# EAGLE board CT_schematic (EAGLE 7.6.0)

Size 100 x 80 mm. Coordinates in mm from the lower left corner, seen from the top.
Outline: 0,0 100,0 100,80 0,80 0,0
Copper layers (1*16): Top 0.035mm / dielectric 1.5mm / Bottom 0.035mm
Design rules "default": minimum track width 10mil, minimum drill 24mil, track to track 8mil, track to pad 8mil, pad to pad 8mil, via to via 8mil, smd to smd 8mil, copper to edge 40mil, drill to drill 8mil, minimum pad ring 10mil, minimum via ring 8mil, stop-mask expansion 4mil, vias tented up to drill 0mil, thermal gap 10mil

## Footprints (pad centres in the part's own frame; a part is rotated, then mirrored left to right if it is on the bottom)
C0603 = smd 0.8 x 0.8: 1 -0.762,0; 2 0.762,0
C0402 = smd 0.5 x 0.5: 1 -0.508,0; 2 0.508,0
C0805 = smd 1.2 x 1.3: 1 -1.016,0; 2 1.016,0
C1206 = smd 1.3 x 1.6: 1 -1.524,0; 2 1.524,0
L0603 = smd 0.8 x 0.8: 1 -0.762,0; 2 0.762,0
L0806 = smd 1.016 x 1.524: 1 -0.889,0; 2 0.889,0
R0603 = smd 0.8 x 0.8: 1 -0.762,0; 2 0.762,0
TFBGA64 = smd 0.35 x 0.35: A1 -1.75,1.75; A2 -1.25,1.75; A3 -0.75,1.75; A4 -0.25,1.75; A5 0.25,1.75; A6 0.75,1.75; A7 1.25,1.75; A8 1.75,1.75; B1 -1.75,1.25; B2 -1.25,1.25; B3 -0.75,1.25; B4 -0.25,1.25; B5 0.25,1.25; B6 0.75,1.25; B7 1.25,1.25; B8 1.75,1.25; C1 -1.75,0.75; C2 -1.25,0.75; C3 -0.75,0.75; C4 -0.25,0.75; C5 0.25,0.75; C6 0.75,0.75; C7 1.25,0.75; C8 1.75,0.75; D1 -1.75,0.25; D2 -1.25,0.25; D3 -0.75,0.25; D4 -0.25,0.25; D5 0.25,0.25; D6 0.75,0.25; D7 1.25,0.25; D8 1.75,0.25; E1 -1.75,-0.25; E2 -1.25,-0.25; E3 -0.75,-0.25; E4 -0.25,-0.25; E5 0.25,-0.25; E6 0.75,-0.25; E7 1.25,-0.25; E8 1.75,-0.25; F1 -1.75,-0.75; F2 -1.25,-0.75; F3 -0.75,-0.75; F4 -0.25,-0.75; F5 0.25,-0.75; F6 0.75,-0.75; F7 1.25,-0.75; F8 1.75,-0.75; G1 -1.75,-1.25; G2 -1.25,-1.25; G3 -0.75,-1.25; G4 -0.25,-1.25; G5 0.25,-1.25; G6 0.75,-1.25; G7 1.25,-1.25; G8 1.75,-1.25; H1 -1.75,-1.75; H2 -1.25,-1.75; H3 -0.75,-1.75; H4 -0.25,-1.75; H5 0.25,-1.75; H6 0.75,-1.75; H7 1.25,-1.75; H8 1.75,-1.75
SOIC-8 = smd 1.6 x 0.6: 1 -2.7,1.905 | smd 1.55 x 0.6: 2 -2.7,0.635; 3 -2.7,-0.635; 4 -2.7,-1.905; 5 2.7,-1.905; 6 2.7,-0.635; 7 2.7,0.635; 8 2.7,1.905
TST-110-05-T-D-RA = drill 1 pad 1.7 square: 1 0,0 | drill 1 pad 1.7: 2 0,2.54; 3 2.54,0; 4 2.54,2.54; 5 5.08,0; 6 5.08,2.54; 7 7.62,0; 8 7.62,2.54; 9 10.16,0; 10 10.16,2.54; 11 12.7,0; 12 12.7,2.54; 13 15.24,0; 14 15.24,2.54; 15 17.78,0; 16 17.78,2.54; 17 20.32,0; 18 20.32,2.54; 19 22.86,0; 20 22.86,2.54
SSOP-28 = smd 1.5 x 0.4: 1 -3.625,4.225; 2 -3.625,3.575; 3 -3.625,2.925; 4 -3.625,2.275; 5 -3.625,1.625; 6 -3.625,0.975; 7 -3.625,0.325; 8 -3.625,-0.325; 9 -3.625,-0.975; 10 -3.625,-1.625; 11 -3.625,-2.275; 12 -3.625,-2.925; 13 -3.625,-3.575; 14 -3.625,-4.225; 15 3.625,-4.225; 16 3.625,-3.575; 17 3.625,-2.925; 18 3.625,-2.275; 19 3.625,-1.625; 20 3.625,-0.975; 21 3.625,-0.325; 22 3.625,0.325; 23 3.625,0.975; 24 3.625,1.625; 25 3.625,2.275; 26 3.625,2.925; 27 3.625,3.575; 28 3.625,4.225
182-009-MALE = drill 1.194 pad 1.524 octagon: 1 -5.537,10.923; 2 -2.769,10.923; 3 0,10.923; 4 2.769,10.923; 5 5.537,10.923; 6 -4.153,8.08; 7 -1.384,8.08; 8 1.384,8.08; 9 4.153,8.08 | hole 3.048: -12.446,9.501; 12.446,9.501
FCI_10118193-0001LF = smd 0.4 x 1.35: 1 -1.3,2.675; 2 -0.65,2.675; 3 0,2.675; 4 0.65,2.675; 5 1.3,2.675 | smd 1.6 x 1.4: 6 -3.2,2.45; 7 3.2,2.45 | smd 1.9 x 1.9: 8 -1.2,0; 9 1.2,0 | hole 0.5: -3.3,0; 3.3,0
SOT143B = smd 1 x 0.7: 1 -0.75,-1 | smd 0.6 x 0.7: 2 0.95,-1; 3 0.95,1; 4 -0.95,1
ABS07-32.768KHZ-7-T = smd 1.1 x 2.4: 1 -2.5,0; 2 0,0
ASFL1 = smd 1.7 x 1.5: 1 -1.27,-1.1; 2 1.27,-1.1; 3 1.27,1.1; 4 -1.27,1.1
TSOT-23-5 = smd 1.3 x 0.62: 1 -1.31,0.95; 2 -1.31,0; 3 -1.31,-0.95; 4 1.31,-0.95; 5 1.31,0.95
DFN8_2X3MC = smd 0.813 x 0.305: 1 -1.398,0.75; 2 -1.398,0.25; 3 -1.398,-0.25; 4 -1.398,-0.75; 5 1.398,-0.75; 6 1.398,-0.25; 7 1.398,0.25; 8 1.398,0.75 | smd 1.753 x 1.549: 9 0,0
JST-2-SMD = smd 1 x 4.6: 1 -1,-3.7; 2 1,-3.7 | smd 1.6 x 3.4: NC1 -3.4,1.5; NC2 3.4,1.5
SON-6 = smd 0.55 x 0.3: 1 -0.355,0.5 | smd 0.52 x 0.3: 2 -0.37,0; 3 -0.37,-0.5; 4 0.37,-0.5; 5 0.37,0; 6 0.37,0.5
SW_4-1437565-2 = smd 1.4 x 2.1: 1 -2.23,4.55; 2 -2.23,-4.55; 3 2.23,4.55; 4 2.23,-4.55
LGM67K-G1J2-24-Z = smd 0.8 x 1.4: A -2,0; C 0,0
NC7SZ125M5X = smd 1.3 x 0.7: 1 -1.3,0.95; 2 -1.3,0; 3 -1.3,-0.95; 4 1.3,-0.95; 5 1.3,0.95

## Placement (x,y rotation side)
C1  1e-07  [C0603]  -33.02,67.31 0 top  (outside the outline)
C2  1e-07  [C0603]  -36.83,67.31 0 top  (outside the outline)
C3  1e-07  [C0603]  -40.64,67.31 0 top  (outside the outline)
C4  1e-07  [C0603]  -44.45,67.31 0 top  (outside the outline)
C5  4.7e-06  [C0603]  -29.21,67.31 0 top  (outside the outline)
C6  1e-07  [C0603]  -48.26,67.31 0 top  (outside the outline)
C7  1e-08  [C0603]  -52.07,67.31 0 top  (outside the outline)
C8  1e-06  [C0603]  -55.88,67.31 0 top  (outside the outline)
C9  1e-11  [C0402]  -19.05,72.39 0 top  (outside the outline)
C10  1e-11  [C0402]  -22.86,72.39 0 top  (outside the outline)
C11  1e-08  [C0402]  -26.67,72.39 0 top  (outside the outline)
C12  1e-07  [C0402]  -30.48,72.39 0 top  (outside the outline)
C13  1e-07  [C0402]  -34.29,72.39 0 top  (outside the outline)
C14  1e-07  [C0402]  -38.1,72.39 0 top  (outside the outline)
C15  1e-07  [C0402]  -41.91,72.39 0 top  (outside the outline)
C16  1e-07  [C0402]  -45.72,72.39 0 top  (outside the outline)
C17  1e-07  [C0402]  -49.53,72.39 0 top  (outside the outline)
C18  1e-08  [C0402]  -53.34,72.39 0 top  (outside the outline)
C19  1e-05  [C0805]  -59.69,54.61 0 top  (outside the outline)
C20  1e-05  [C0805]  -64.77,54.61 0 top  (outside the outline)
C21  1e-07  [C0402]  -57.15,72.39 0 top  (outside the outline)
C22  1e-05  [C1206]  -29.21,54.61 0 top  (outside the outline)
C23  1e-05  [C1206]  -35.56,54.61 0 top  (outside the outline)
C24  1e-08  [C0402]  -60.96,72.39 0 top  (outside the outline)
C25  1e-08  [C0402]  -64.77,72.39 0 top  (outside the outline)
F1  240.0  [L0603]  -59.69,67.31 0 top  (outside the outline)
I1  3.3e-06  [L0806]  -41.91,54.61 0 top  (outside the outline)
R2  1000.0  [R0603]  -63.5,67.31 0 top  (outside the outline)
R4  4700.0  [R0603]  -67.31,67.31 0 top  (outside the outline)
R5  10000.0  [R0603]  -48.26,62.23 0 top  (outside the outline)
R6  10000.0  [R0603]  -53.34,62.23 0 top  (outside the outline)
R7  10000.0  [R0603]  -58.42,62.23 0 top  (outside the outline)
R8  10000.0  [R0603]  -63.5,62.23 0 top  (outside the outline)
R9  10000.0  [R0603]  -68.58,62.23 0 top  (outside the outline)
R10  100000.0  [R0603]  -27.94,62.23 0 top  (outside the outline)
R11  220000.0  [R0603]  -33.02,62.23 0 top  (outside the outline)
R12  1000000.0  [R0603]  -22.86,62.23 0 top  (outside the outline)
R13  10000.0  [R0603]  -15.24,67.31 0 top  (outside the outline)
R14  10000.0  [R0603]  -20.32,67.31 0 top  (outside the outline)
R15  9100.0  [R0603]  -71.12,67.31 0 top  (outside the outline)
R16  680000.0  [R0603]  -38.1,62.23 0 top  (outside the outline)
R17  120000.0  [R0603]  -43.18,62.23 0 top  (outside the outline)
R18  2000.0  [R0603]  -15.24,72.39 0 top  (outside the outline)
R19  10000.0  [R0603]  -25.4,67.31 0 top  (outside the outline)
U1  STM32L152R6H6  [TFBGA64]  -58.42,26.67 0 top  (outside the outline)
U2  AT25256B-SSHL-T  [SOIC-8]  -24.13,39.37 0 top  (outside the outline)
U3  TST-110-05-T-D-RA  [TST-110-05-T-D-RA]  -46.99,45.72 0 top  (outside the outline)
U4  ST3241EBPR  [SSOP-28]  -58.42,7.62 0 top  (outside the outline)
U5  182-009-113R531  [182-009-MALE]  -36.83,6.35 0 top  (outside the outline)
U6  10118193-0001LF  [FCI_10118193-0001LF]  -50.8,38.1 0 top  (outside the outline)
U7  prtr5v0u2ax  [SOT143B]  -24.13,77.47 0 top  (outside the outline)
U8  ABS07-32.768KHZ-7-T  [ABS07-32.768KHZ-7-T]  -64.77,48.26 0 top  (outside the outline)
U9  ASFL1-25MHZ-NCS  [ASFL1]  -41.91,38.1 0 top  (outside the outline)
U10  ltc3406es5  [TSOT-23-5]  -15.24,60.96 0 top  (outside the outline)
U11  MCP73831T-2ACI/MC  [DFN8_2X3MC]  -34.29,76.2 0 top  (outside the outline)
U12  S2B-PH-SM4-TB(LF)(SN)  [JST-2-SMD]  -41.91,29.21 0 top  (outside the outline)
U13  TPS3895ADRYR  [SON-6]  -27.94,76.2 0 top  (outside the outline)
U14  4-1437565-2  [SW_4-1437565-2]  -27.94,27.94 0 top  (outside the outline)
U15  Q65110A2395  [LGM67K-G1J2-24-Z]  -17.78,55.88 0 top  (outside the outline)
U16  nc7sz125m5x  [NC7SZ125M5X]  -46.99,54.61 0 top  (outside the outline)
U17  nc7sz125m5x  [NC7SZ125M5X]  -53.34,54.61 0 top  (outside the outline)

## Library data of the parts
C1-C25 F1 I1 R2 R4-R19 U1-U17 = circuit_tree

## Nets
CLK_CRYSTAL_U1_A1: C9.1 U1.A1 U8.1
CLK_CRYSTAL_U1_B1: C10.1 U1.B1 U8.2
CLK_U1_C1: U1.C1 U9.3
GND: C1.2 C2.2 C3.2 C4.2 C5.2 C6.2 C7.2 C8.2 C9.2 C10.2 C11.2 C12.2 C13.2 C16.2 C17.2 C18.2 C19.2 C20.1 C20.2 C21.2 C22.2 C23.2 C24.2 C25.2 R2.2 R5.2 R11.2 R15.2 R17.2 R18.2 U1.C2 U1.D4 U1.D5 U1.D6 U1.F1 U2.4 U3.4 U3.6 U3.8 U3.10 U3.12 U3.14 U3.16 U3.18 U3.20 U4.23 U4.25 U5.5 U6.5 U6.6 U6.7 U6.8 U6.9 U7.1 U9.2 U10.2 U11.6 U11.9 U12.2 U13.2 U15.C U16.2 U16.3 U17.1 U17.3
INPUT_USBPOWER_5V: C22.1 R19.2 U6.1 U7.4 U11.1 U11.2
NET_U1_B2: C6.1 U1.B2
NET_U1_B4: R5.1 U1.B4
NET_U1_E1: R4.1 U1.E1 U17.4
NET_U1_H1: C7.1 C8.1 F1.1 U1.G1 U1.H1
NET_U1_H7: U15.A
NET_U1_H8: U14.3 U14.4
NET_U2_3: R6.1 U2.3
NET_U2_7: R8.1 U2.7
NET_U4_1: C15.1 U4.1
NET_U4_2: C15.2 U4.2
NET_U4_3: C17.1 U4.3
NET_U4_22: R10.1 U4.22
NET_U4_24: C14.2 U4.24
NET_U4_27: C16.1 U4.27
NET_U4_28: C14.1 U4.28
NET_U5_2: U4.4 U5.2
NET_U5_3: U4.9 U5.3
NET_U5_7: U4.5 U5.7
NET_U5_8: U4.10 U5.8
NET_U10_1: U10.1
NET_U10_3: I1.1 U10.3
NET_U10_5: R11.1 R12.1 U10.5
NET_U10_ATNET_3: I1.2 R12.2
NET_U11_5: R19.1 U11.5
NET_U11_8: R18.1 U11.8
NET_U13_1: R14.1 R15.1 U13.1
NET_U13_3: R16.2 R17.1 U13.3
NET_U13_4: R13.1 U13.4 U16.4 U17.2
NET_U14_1: R2.1 U14.1 U14.2
PROC_SPI1_MISO: U1.A4 U2.2
PROC_SPI1_MOSI: U1.C4 U2.5
PROC_SPI1_NSS: R7.1 U1.A6 U2.1
PROC_SPI1_SCK: U1.F4 U2.6
PROC_SYS_JTCK_SWCLK: U1.A7 U3.9
PROC_SYS_JTDO_TRACESWO: U1.A5 U3.13
PROC_SYS_JTMS_SWDIO: U1.A8 U3.7
PROC_USART2_CTS: U1.G2 U4.13
PROC_USART2_RTS: U1.H2 U4.18
PROC_USART2_RX: U1.G3 U4.19
PROC_USART2_TX: U1.F3 U4.14
PROC_USB_DM: U1.C8 U6.2 U7.3
PROC_USB_DP: U1.B8 U6.3 U7.2
RST_OUT_U3_SRESET_B: R9.1 U3.15 U16.1
VCC_S1_3V7: C19.1 C23.1 U10.4 U11.3 U11.4 U12.1
VCC_TIER1_3V3: C1.1 C2.1 C3.1 C4.1 C5.1 C11.1 C12.1 C13.1 C18.1 C20.2 C21.1 C24.1 C25.1 F1.2 I1.2 R4.2 R6.2 R7.2 R8.2 R9.2 R10.2 R12.2 R13.2 R14.2 R16.1 U1.D2 U1.E4 U1.E5 U1.E6 U2.8 U3.1 U4.26 U9.4 U13.6 U16.5 U17.5

## Tracks (layer width: path | path; a pad name or v marks a point on that pad's centre or on a via)
CLK_CRYSTAL_U1_A1  (2 unrouted)
CLK_CRYSTAL_U1_B1  (2 unrouted)
CLK_U1_C1  (1 unrouted)
GND  (64 unrouted)
INPUT_USBPOWER_5V  (5 unrouted)
NET_U1_B2  (1 unrouted)
NET_U1_B4  (1 unrouted)
NET_U1_E1  (2 unrouted)
NET_U1_H1  (4 unrouted)
NET_U1_H8  (1 unrouted)
NET_U2_3  (1 unrouted)
NET_U2_7  (1 unrouted)
NET_U4_1  (1 unrouted)
NET_U4_2  (1 unrouted)
NET_U4_3  (1 unrouted)
NET_U4_22  (1 unrouted)
NET_U4_24  (1 unrouted)
NET_U4_27  (1 unrouted)
NET_U4_28  (1 unrouted)
NET_U5_2  (1 unrouted)
NET_U5_3  (1 unrouted)
NET_U5_7  (1 unrouted)
NET_U5_8  (1 unrouted)
NET_U10_3  (1 unrouted)
NET_U10_5  (2 unrouted)
NET_U10_ATNET_3  (1 unrouted)
NET_U11_5  (1 unrouted)
NET_U11_8  (1 unrouted)
NET_U13_1  (2 unrouted)
NET_U13_3  (2 unrouted)
NET_U13_4  (3 unrouted)
NET_U14_1  (2 unrouted)
PROC_SPI1_MISO  (1 unrouted)
PROC_SPI1_MOSI  (1 unrouted)
PROC_SPI1_NSS  (2 unrouted)
PROC_SPI1_SCK  (1 unrouted)
PROC_SYS_JTCK_SWCLK  (1 unrouted)
PROC_SYS_JTDO_TRACESWO  (1 unrouted)
PROC_SYS_JTMS_SWDIO  (1 unrouted)
PROC_USART2_CTS  (1 unrouted)
PROC_USART2_RTS  (1 unrouted)
PROC_USART2_RX  (1 unrouted)
PROC_USART2_TX  (1 unrouted)
PROC_USB_DM  (2 unrouted)
PROC_USB_DP  (2 unrouted)
RST_OUT_U3_SRESET_B  (2 unrouted)
VCC_S1_3V7  (5 unrouted)
VCC_TIER1_3V3  (35 unrouted)